# Altium PCB 如意硬件系统模块0831.PcbDoc (part 2 of 3)
Units mm, origin at the board's own origin, x right, y up, seen from the top; angles counter-clockwise.
Board outline 160 x 114.8 mm, 2 copper layers (Top Layer, Bottom Layer); 173 components, 141 nets, 673 pads, 206 vias.
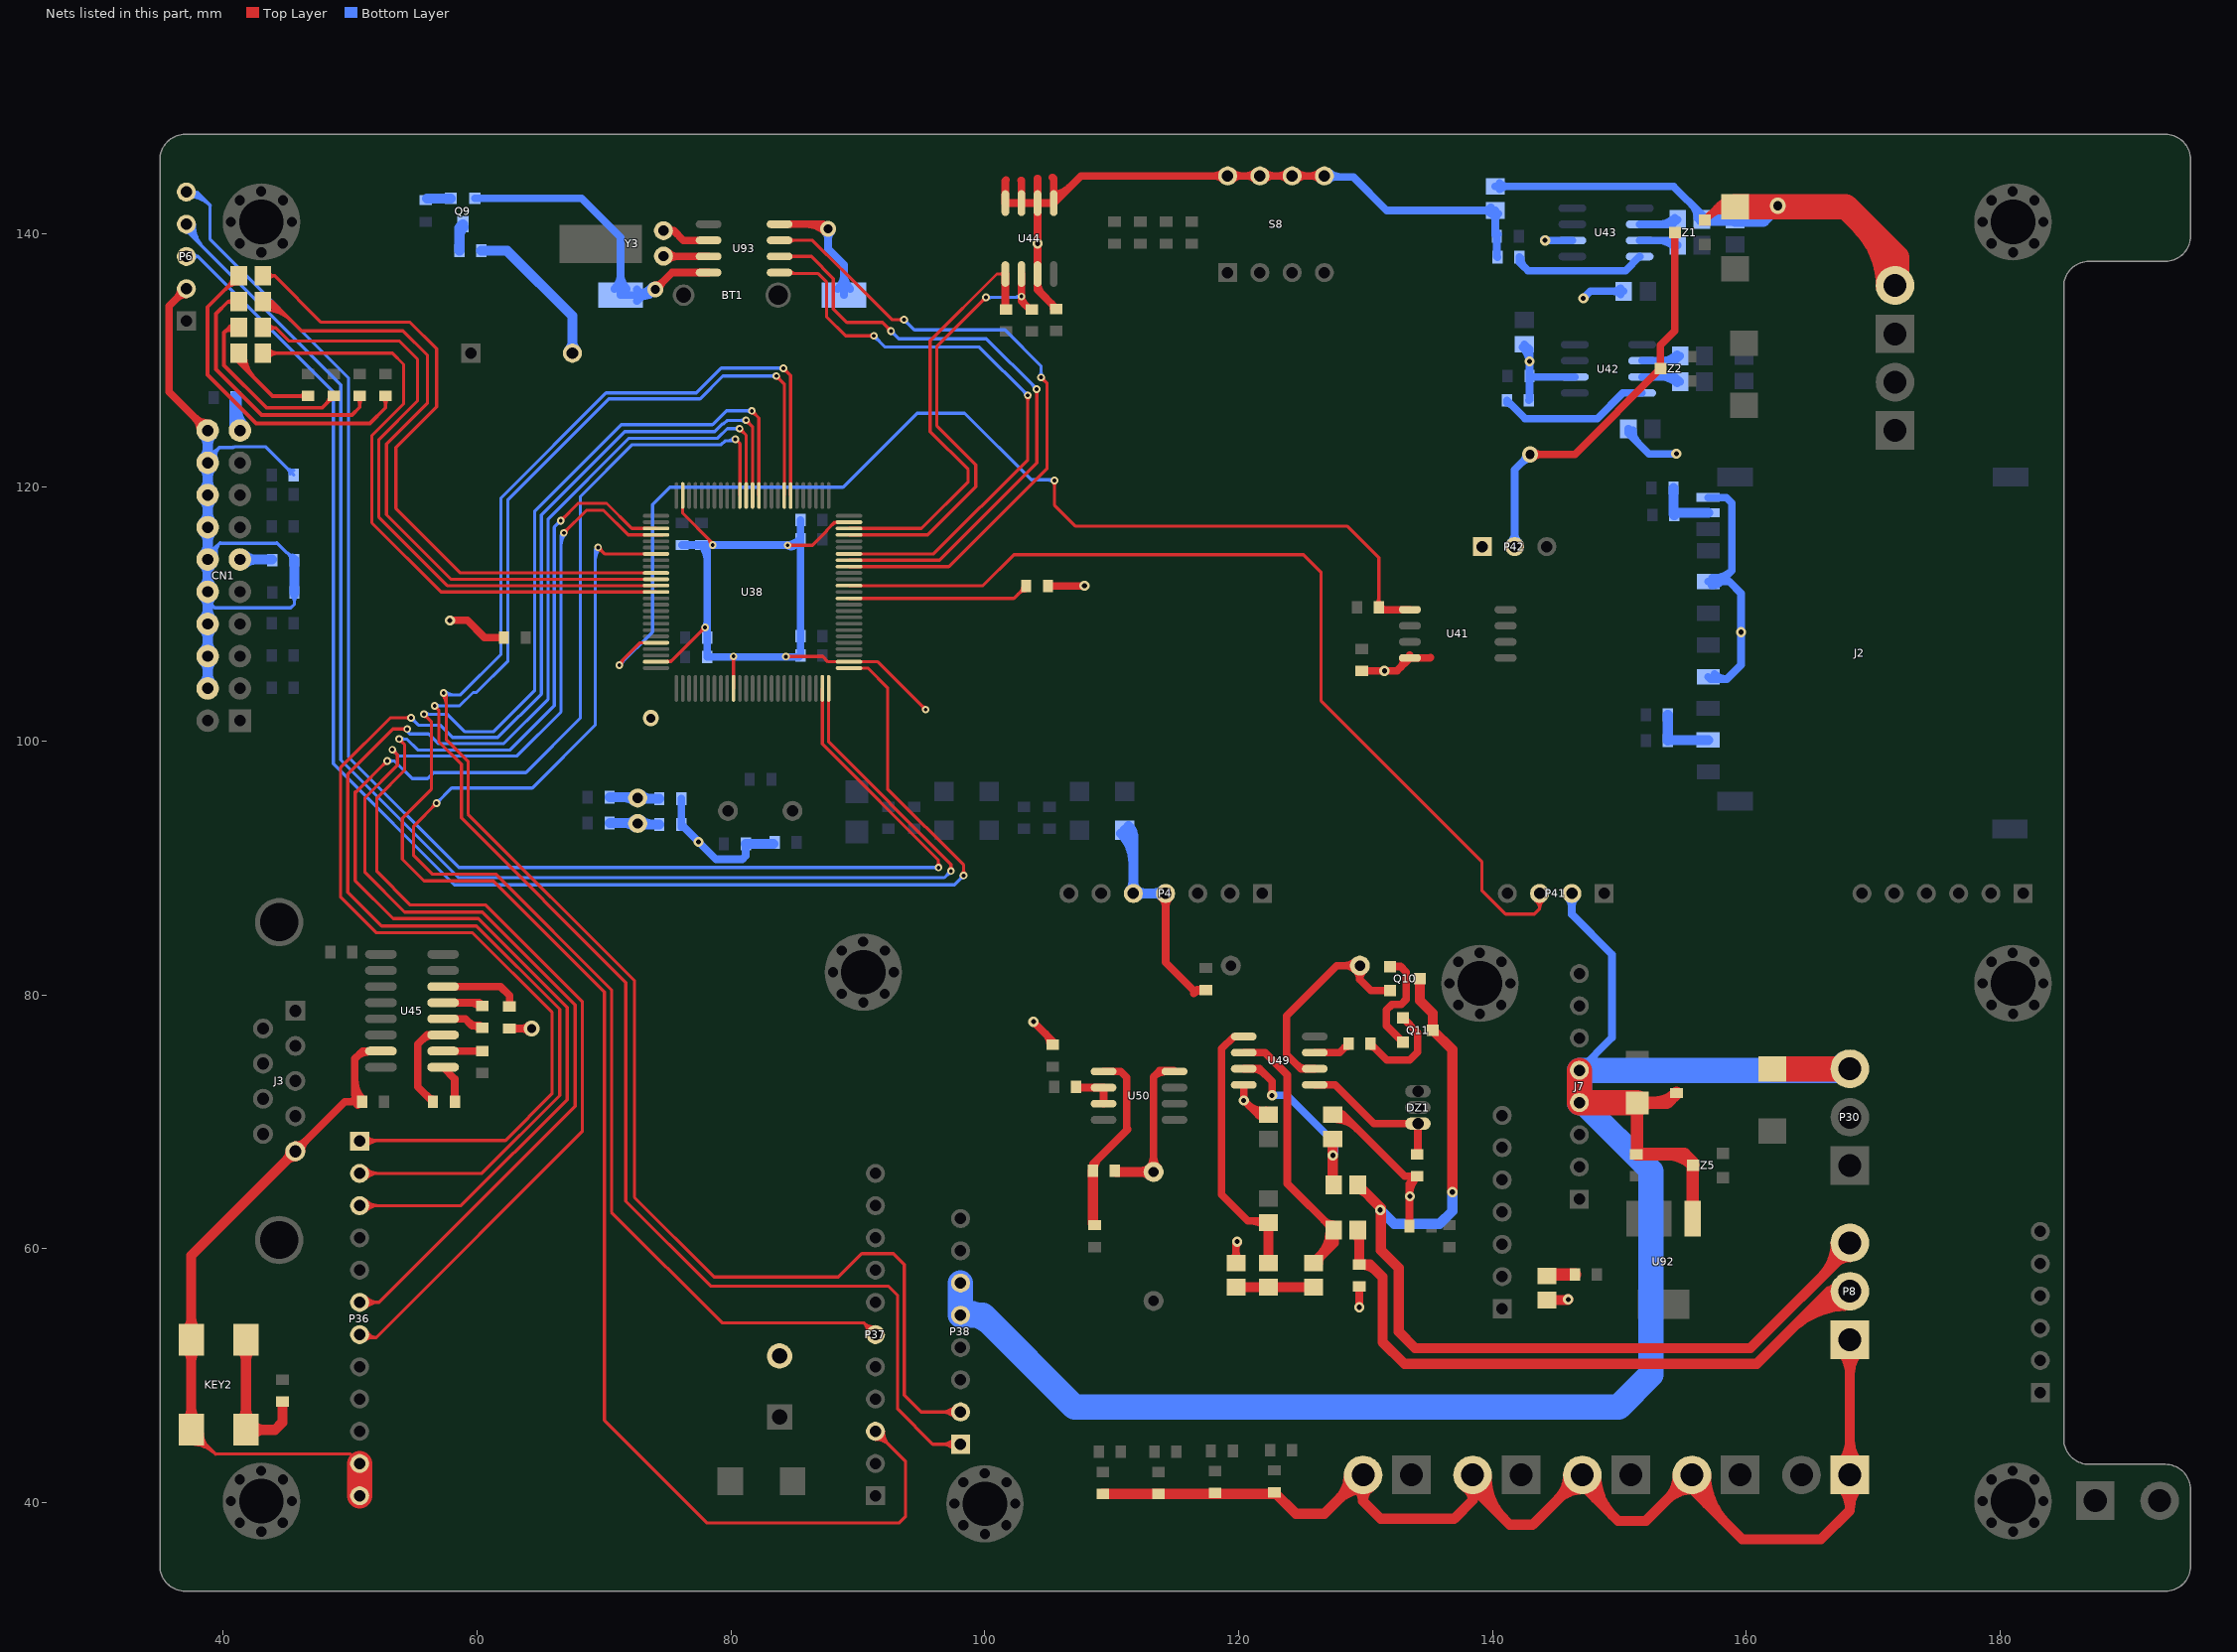
[diagram p2: the nets of this part, all layers, seen from the top]

## Via types
v1: diameter 0.6, hole 0.3, Top Layer to Bottom Layer, 151 vias
v2: diameter 0.8, hole 0.4, Top Layer to Bottom Layer, 35 vias
v3: diameter 1.27, hole 0.711, Top Layer to Bottom Layer, 15 vias
v4: diameter 1.8, hole 0.9, Top Layer to Bottom Layer, 2 vias
v5: diameter 1.8, hole 0.8, Top Layer to Bottom Layer, 1 vias
v6: diameter 1.66, hole 1.66, Top Layer to Bottom Layer, 1 vias
v7: diameter 1.18, hole 1.18, Top Layer to Bottom Layer, 1 vias

## Nets (pads, with @x,y where several pads share a name; then routed paths per layer and width w, separated by ;. In a path a pad name is that pad's centre, name@x,y a point inside that pad or via, vN(x,y) a via of type N, cw(c..) or ccw(c..) an arc to the next point about the centre after c; other vN are vias at no path point) (continued)
CAN2L: C73.2 D53.1 P44.2 R160.2 R357.2 Z1.2 | length 60.6
  Top Layer w0.6: Z1.2@156.713,141.024 157.795,142.106 ; Z1.2@156.998,141.309 cw(c158.718,139.589) D53.1@158.983,142.007 ; 157.196,141.507 cw(c157.905,140.798) D53.1@158.546,141.568 ; 157.66,141.971 cw(c158.327,141.305) D53.1@158.93,142.029 ; 157.882,142.193 cw(c158.893,141.182) D53.1@159.049,142.603 ; D53.1@158.384,141.762 ccw(c157.795,141.429) 157.795,142.106 ; D53.1@158.384,142.45 cw(c157.795,142.783) 157.795,142.106 ; D53.1@159.094,142.106 157.795,142.106
  Top Layer w2: D53.1@159.094,142.106 167.819,142.106 171.825,138.1 171.825,136.011 P44.2@171.704,135.89 ; 169.161,140.764 cw(c164.287,135.89) P44.2@171.18,135.89 ; P44.2@171.333,136.261 ccw(c170.147,137.447) 171.825,137.447
  Bottom Layer w0.6: C73.2@140.208,143.698 140.21,143.7 154.25,143.7 156.488,141.462 R357.2@156.488,141.09 ; C73.2@140.555,143.451 cw(c141.158,142.848) 141.158,143.7 ; C73.2@140.555,143.945 ccw(c141.148,144.538) 141.148,143.7 ; 155.698,142.252 cw(c154.636,141.19) R357.2@156.138,141.19
  Bottom Layer w1: R357.2@156.488,141.09 159.028,141.09 R160.2@159.094,141.024 161.324,141.024 v3(162.475,142.175)
CAN_GND: P42.2 Z1.3 Z2.3 | length 36.5
  Top Layer w0.6: v3@142.8,122.575 v3(142.95,122.575) 146.477,122.575 Z2.3@153.229,129.327 153.225,129.331 153.225,131.175 154.363,132.313 Z1.3@154.363,140.074 ; v3@143.187,122.338 cw(c143.759,121.766) 143.759,122.575 cw(c143.759,123.384) v3@143.187,122.812
  Bottom Layer w0.6: P42.2@141.414,115.634 ccw(c140.646,116.402) 141.732,116.402 ccw(c142.818,116.402) P42.2@142.05,115.634 ; P42.2@141.732,115.316 141.732,121.357 v3(142.95,122.575) ; v3@142.615,122.575 cw(c141.806,122.575) 142.378,122.003 cw(c142.95,121.431) v3@142.95,122.24
DATA: P36.3 U38.65 | length 118.1
  Top Layer w0.254: P36.3@50.736,63.384 58.736,63.384 67.081,71.73 67.081,79.019 60.096,86.004 53.381,86.004 50.394,88.992 50.394,95.987 50.47,95.987 v1(52.908,98.425) ; P36.3@50.997,63.123 cw(c51.627,62.493) 51.627,63.384 cw(c51.627,64.275) P36.3@50.997,63.645 ; P36.3@51.177,62.943 cw(c52.24,61.88) 52.24,63.384 cw(c52.24,64.888) P36.3@51.177,63.825 ; v1@52.735,98.425 cw(c52.318,98.425) 52.613,98.13 cw(c52.908,97.834) v1@52.908,98.252 ; v1(80.34,123.774) 80.692,123.422 U38.65@80.692,119.34
  Bottom Layer w0.254: v1(52.908,98.425) 53.492,98.425 54.889,97.028 56.083,97.028 56.566,97.511 63.83,97.511 68.125,101.805 68.125,119.255 72.212,123.342 79.223,123.342 79.527,123.647 80.213,123.647 v1(80.34,123.774) ; v1@53.031,98.303 cw(c53.326,98.007) 53.326,98.425 cw(c53.326,98.843) v1@53.031,98.547 ; 79.616,123.647 ccw(c79.616,124.498) v1@80.218,123.897
DS_I/O: U38.43 U93.6 | length 53.1
  Top Layer w0.254: U93.6@83.82,138.176 86.324,138.176 88.062,136.438 88.062,134.038 89.125,132.975 91.925,132.975 v1(92.6,132.3) ; U93.6@84.657,138.05 cw(c84.96,137.747) 84.96,138.176 cw(c84.96,138.605) U93.6@84.657,138.302 ; U38.43@89.292,114.24 96.435,114.24 104.1,121.905 104.1,127.7 v1(104.075,127.725) ; v1@92.427,132.3 ccw(c92.009,132.3) 92.305,132.595 ccw(c92.6,132.891) v1@92.6,132.473 ; v1@103.953,127.603 cw(c103.597,127.247) 104.1,127.247 ; 104.1,127.368 cw(c104.432,127.368) v1@104.197,127.603
  Bottom Layer w0.254: v1@92.6,132.127 cw(c92.6,131.709) 92.895,132.005 cw(c93.191,132.3) v1@92.773,132.3 ; v1(92.6,132.3) 93.201,131.699 100.101,131.699 v1(104.075,127.725) ; v1@103.902,127.725 ccw(c103.484,127.725) 103.78,128.02 ccw(c104.075,128.316) v1@104.075,127.898
DS_RST: U38.44 U93.5 | length 50.6
  Top Layer w0.254: U93.5@83.82,136.906 83.901,136.825 86.871,136.825 87.521,136.175 87.521,133.429 89.025,131.925 v1(91.25,131.925) ; U93.5@84.657,137.032 ccw(c85.156,137.531) 85.156,136.825 ; U38.44@89.292,114.74 95.969,114.74 103.375,122.146 v1(103.375,127.225) ; v1@91.128,131.803 ccw(c90.832,131.507) 90.832,131.925 ccw(c90.832,132.343) v1@91.128,132.047 ; v1@103.253,127.103 cw(c102.957,126.807) 103.375,126.807 cw(c103.793,126.807) v1@103.497,127.103
  Bottom Layer w0.254: v1@91.25,131.752 cw(c91.25,131.334) 91.545,131.63 cw(c91.841,131.925) v1@91.423,131.925 ; v1(91.25,131.925) 92.14,131.035 99.565,131.035 v1(103.375,127.225) ; v1@103.202,127.225 ccw(c102.784,127.225) 103.08,127.52 ccw(c103.375,127.816) v1@103.375,127.398
DS_SCLK: U38.42 U93.7 | length 55.1
  Top Layer w0.254: U93.7@83.82,139.446 86.411,139.446 88.75,137.107 88.75,137.125 92.675,133.2 v1(93.625,133.2) ; U93.7@84.657,139.32 cw(c84.96,139.017) 84.96,139.446 cw(c84.96,139.875) U93.7@84.657,139.572 ; U38.42@89.292,113.74 97.154,113.74 104.9,121.486 104.9,128.175 v1(104.425,128.65) ; v1@93.503,133.078 ccw(c93.207,132.782) 93.207,133.2 ccw(c93.207,133.618) v1@93.503,133.322 ; v1@104.425,128.477 cw(c104.425,128.059) 104.72,128.355 cw(c105.016,128.65) v1@104.598,128.65
  Bottom Layer w0.254: v1@93.625,133.027 cw(c93.625,132.609) 93.92,132.905 cw(c94.216,133.2) v1@93.798,133.2 ; v1(93.625,133.2) 94.44,132.385 101.575,132.385 104.425,129.534 v1(104.425,128.65) ; v1@104.303,128.772 ccw(c104.007,129.068) 104.425,129.068 ccw(c104.843,129.068) v1@104.547,128.772
F_CS: R153.1 U38.96 U41.1 | length 93.9
  Top Layer w0.254: v1@71.253,105.975 v1(71.2,105.975) 71.2,106.1 72.84,107.74 U38.96@74.092,107.74 ; v1@71.373,105.975 cw(c72.091,105.975) 71.583,106.483 ; v1@105.353,120.402 cw(c105.057,120.107) 105.475,120.107 cw(c105.893,120.107) v1@105.597,120.402 ; v1@105.475,120.575 105.475,118.6 107.159,116.916 128.559,116.916 131.031,114.444 R153.1@131.031,110.53 ; R153.1@130.834,110.821 ccw(c130.357,111.298) 131.031,111.298 ccw(c131.706,111.298) R153.1@131.229,110.821
  Top Layer w0.6: R153.1@131.031,110.53 131.215,110.346 U41.1@133.483,110.346 ; R153.1@131.106,110.512 ccw(c131.506,110.912) 131.506,110.346
  Bottom Layer w0.254: v1@71.2,106.148 ccw(c71.2,106.566) 71.495,106.27 ccw(c71.791,105.975) v1@71.373,105.975 ; v1@71.253,105.975 v1(71.2,105.975) 73.812,108.587 73.812,118.618 75.184,119.99 88.824,119.99 94.666,125.832 98.4,125.832 103.656,120.575 v1@105.475,120.575 ; 104.935,120.575 cw(c104.935,119.984) v1@105.353,120.402
  other v1: 105.475,120.524
GND: BT1.2 C5.1 C6.1 C14.2 C15.1 C16.1 C17.1 C18.1 C19.1 C20.1 C21.1 C22.1 C29.1 C31.1 C32.1 C33.1 C34.1 C36.1 C37.2 C44.1 C47.1 C49.2 C51.2 C53.2 C55.2 C56.2 C57.2 C69.1 C70.1 C72.2 C73.1 C74.2 C75.1 C76.2 C79.1 C80.2 C81.1 CN1.4 CN1.6 CN1.8 CN1.10 CN1.12 CN1.14 CN1.16 CN1.18 CN1.20 D60.1 J2.3 J2.6 J2.12 J3.5 J7.4 J7.5 KEY2.1 KEY2.4 L2.1 LD83.2 P4.4 P4.5 P6.2 P7.1 P8.1 P9.2 P10.2 P11.2 P12.2 P30.3 P36.11 P36.12 P38.5 P38.6 P41.2 P42.1 Q9.E R137.2 R144.1 R146.1 R147.1 R157.2 R158.2 R172.1 R177.1 R184.2 R191.2 R362.1 S8.5 S8.6 S8.7 S8.8 U38.10 U38.27 U38.49 U38.74 U38.99 U41.4 U42.2 U43.2 U44.1 U44.2 U44.3 U44.4 U44.7 U45.15 U49.4 U50.4 U92.1 U93.4 Z5.3 | length 843.2
  Top Layer w0.254: KEY2.1@37.465,44.597 cw(c37.465,41.886) 39.382,43.803 ; KEY2.1@37.465,44.851 cw(c37.465,42.753) 38.948,44.237 ; KEY2.1@37.465,45.105 cw(c37.465,43.62) 38.515,44.67 ; KEY2.1@37.465,45.72 39.36,43.825 49.975,43.825 P36.11@50.736,43.064 ; KEY2.1@38.084,45.47 ccw(c38.975,45.47) KEY2.1@38.345,44.84 ; KEY2.1@38.338,45.47 ccw(c39.842,45.47) 38.779,44.406 ; U38.99@74.092,106.24 75.24,106.24 v1(77.951,108.951) ; U38.99@74.997,106.258 ccw(c74.997,106.888) 75.443,106.443 ; U38.74@76.192,119.34 76.192,117.94 78.475,115.657 v1@78.475,115.275 ; v1@77.778,108.951 cw(c77.361,108.951) 77.656,108.656 cw(c77.951,108.361) v1@77.951,108.778 ; 78.154,115.978 cw(c77.616,115.44) v1@78.377,115.44 ; v1@80.07,106.545 cw(c79.774,106.249) 80.192,106.249 cw(c80.61,106.249) v1@80.314,106.545 ; U38.10@80.192,104.14 v1(80.192,106.667) v1@80.2,106.675 ; v1(84.325,106.65) 87.225,106.65 87.635,106.24 U38.27@89.292,106.24 91.56,106.24 v1(95.325,102.475) ; v1@84.447,106.528 cw(c84.743,106.232) 84.743,106.65 cw(c84.743,107.068) v1@84.447,106.772 ; v1(84.45,115.425) 86.412,115.425 87.552,116.565 87.552,116.61 88.182,117.24 U38.49@89.292,117.24 ; v1@84.572,115.303 cw(c84.868,115.007) 84.868,115.425 cw(c84.868,115.843) v1@84.572,115.547 ; 88.007,117.065 cw(c88.387,116.685) U38.49@88.387,117.222 ; 88.08,117.138 cw(c88.307,116.911) U38.49@88.383,117.223 ; v1@95.152,102.475 ccw(c94.734,102.475) 95.03,102.77 ccw(c95.325,103.066) v1@95.325,102.648
  Top Layer w0.6: P6.2@36.634,135.636 cw(c35.548,135.636) 36.316,134.868 cw(c37.084,134.1) P6.2@37.084,135.186 ; P6.2@37.084,135.636 35.71,134.262 35.71,127.516 CN1.20@38.766,124.46 ; CN1.20@38.177,124.46 ccw(c36.755,124.46) 37.76,125.465 ccw(c38.766,126.471) CN1.20@38.766,125.049 ; J3.5@45.67,67.666 49.575,71.571 C36.1@50.924,71.571 50.35,72.145 50.35,74.95 50.965,75.565 U45.15@52.414,75.565 ; J3.5@45.67,68.153 ccw(c45.67,69.33) 46.502,68.498 ccw(c47.334,67.666) J3.5@46.157,67.666 ; 50.35,71.858 ccw(c51.117,71.858) C36.1@50.575,71.316 ; 50.35,73.307 ccw(c52.566,73.307) C36.1@50.999,71.74 ; 50.491,75.091 cw(c51.514,74.069) U45.15@51.514,75.515 ; C36.1@50.582,71.912 ccw(c50.924,72.254) C36.1@50.924,71.771 ; 50.691,75.291 cw(c51.296,74.685) U45.15@51.502,75.516 ; v2(57.85,109.5) 59.225,109.5 60.578,108.147 R147.1@62.1,108.147 ; C34.1@62.541,77.34 v3(64.285,77.34) ; v3@64.048,77.103 ccw(c63.476,76.531) 63.476,77.34 ccw(c63.476,78.149) v3@64.048,77.577 ; v3(74.025,135.575) 75.356,136.906 U93.4@78.232,136.906 ; v3@74.025,135.91 ccw(c74.025,136.719) 74.597,136.147 ccw(c75.169,135.575) v3@74.36,135.575 ; 101.675,144.2 101.61,144.135 U44.4@101.61,142.381 U44.3@102.88,142.381 ; 102.85,144.175 102.88,144.145 U44.3@102.88,142.381 ; v2(103.825,77.875) 105.343,76.357 C51.2@105.343,76.059 ; 104.15,144.325 U44.2@104.15,142.381 ; U44.7@104.155,136.082 ccw(c105.451,136.082) 104.535,135.165 ; 104.791,76.909 cw(c103.941,76.059) C51.2@105.143,76.059 ; R137.2@104.975,112.211 107.836,112.211 v2(107.85,112.225) ; 105.244,134.456 cw(c104.836,134.048) C29.1@105.413,134.048 ; 105.325,144.4 105.42,144.305 U44.1@105.42,142.381 ; U44.1@105.42,142.497 ccw(c105.42,142.777) U44.1@105.618,142.579 ; U44.1@105.42,143.097 ccw(c105.42,144.826) 106.642,143.604 ; C29.1@105.613,134.087 104.15,135.55 U44.7@104.15,136.793 v2(104.15,139.2) U44.2@104.15,142.381 ; R172.1@112.939,66.385 ccw(c112.107,67.217) 113.284,67.217 ccw(c114.461,67.217) R172.1@113.629,66.385 ; R172.1@113.284,66.04 113.284,73.534 113.775,74.025 114.867,74.025 U50.4@114.938,73.954 ; 113.326,73.576 cw(c114.227,72.675) U50.4@114.227,73.949 ; 113.514,73.764 cw(c114.028,73.249) U50.4@114.225,73.949 ; P4.4@113.918,87.666 cw(c113.15,86.898) 114.236,86.898 cw(c115.322,86.898) P4.4@114.554,87.666 ; P4.4@114.236,87.984 114.236,82.564 116.575,80.225 116.738,80.388 C44.1@117.405,80.388 ; 116.451,80.101 cw(c117.011,79.541) C44.1@117.276,80.288 ; S8.8@118.808,144.208 ccw(c118.04,143.44) 118.04,144.526 ccw(c118.04,145.612) S8.8@118.808,144.844 ; S8.8@119.444,144.208 cw(c120.212,143.44) 120.212,144.526 cw(c120.212,145.612) S8.8@119.444,144.844 ; R184.2@119.541,59.113 ccw(c118.943,59.711) 119.788,59.711 ccw(c120.633,59.711) R184.2@120.035,59.113 ; R184.2@119.788,58.866 119.788,60.588 v2@119.825,60.625 ; 119.788,60.099 cw(c120.326,60.099) v2@119.946,60.479 ; U49.4@120.396,72.898 v2(120.396,71.679) 121.525,70.55 ; 120.748,71.327 ccw(c121.863,72.443) C49.2@122.162,70.894 ; S8.7@121.348,144.208 ccw(c120.58,143.44) 120.58,144.526 ccw(c120.58,145.612) S8.7@121.348,144.844 ; 121.547,70.528 ccw(c122.122,71.102) C49.2@122.275,70.305 ; C49.2@121.949,70.339 ccw(c121.525,70.019) 121.525,70.55 ; C49.2@121.949,70.761 cw(c121.525,71.081) 121.525,70.55 ; S8.7@121.984,144.208 cw(c122.752,143.44) 122.752,144.526 cw(c122.752,145.612) S8.7@121.984,144.844 ; C49.2@122.328,70.55 121.525,70.55 ; S8.6@123.888,144.208 ccw(c123.12,143.44) 123.12,144.526 ccw(c123.12,145.612) S8.6@123.888,144.844 ; S8.6@124.524,144.208 cw(c125.292,143.44) 125.292,144.526 cw(c125.292,145.612) S8.6@124.524,144.844 ; S8.5@126.428,144.208 ccw(c125.66,143.44) 125.66,144.526 ccw(c125.66,145.612) S8.5@126.428,144.844 ; S8.5@126.746,144.526 S8.6@124.206,144.526 S8.7@121.666,144.526 S8.8@119.126,144.526 107.565,144.526 U44.1@105.42,142.381 ; R177.1@127.408,70.55 128.225,70.55 ; R177.1@127.508,70.2 cw(c127.508,67.624) 129.329,69.446 ; R177.1@127.508,70.8 cw(c127.508,69.673) 128.305,70.47 ; R177.1@127.711,70.265 cw(c128.104,69.712) 128.583,70.192 ; R177.1@127.784,70.335 cw(c128.225,69.991) 128.225,70.55 ; R177.1@127.784,70.765 ccw(c128.225,71.109) 128.225,70.55 ; v2@129.497,55.275 R362.1@129.497,57.024 ; C33.1@129.688,105.517 132.464,105.517 U41.4@133.483,106.536 135.061,106.536 135.1,106.575 ; 132.751,105.804 ccw(c132.264,106.291) U41.4@132.908,106.536 ; U41.4@133.407,106.46 ccw(c133.214,106.652) U41.4@133.469,106.749 ; C53.2@133.446,61.785 133.446,65.104 R191.2@134.055,65.713 133.062,65.713 128.225,70.55 ; v2@133.446,64.212 cw(c135.463,64.212) R191.2@134.037,65.638 ; 133.446,64.915 cw(c134.162,64.915) R191.2@133.987,65.61 ; R191.2@133.714,65.372 ccw(c133.372,65.713) R191.2@133.855,65.713 ; U44.3@102.88,142.381 U44.2@104.15,142.381 ; U44.2@104.15,142.381 U44.1@105.42,142.381
  Top Layer w0.8: KEY2.1@37.041,46.394 ccw(c36.016,47.419) 37.465,47.419 ccw(c38.914,47.419) KEY2.1@37.889,46.394 ; KEY2.4@37.041,52.158 cw(c36.016,51.133) 37.465,51.133 cw(c38.914,51.133) KEY2.4@37.889,52.158 ; KEY2.4@37.041,53.506 ccw(c36.016,54.531) 37.465,54.531 ccw(c38.914,54.531) KEY2.4@37.889,53.506 ; KEY2.1@37.465,45.72 KEY2.4@37.465,52.832 37.465,59.461 J3.5@45.67,67.666 ; J3.5@45.283,67.666 cw(c44.347,67.666) 45.009,67.004 cw(c45.67,66.343) J3.5@45.67,67.278 ; C55.2@109.3,40.673 C76.2@113.677,40.673 C56.2@122.673,40.673 ; C47.1@110.339,66.04 R172.1@113.284,66.04 ; R172.1@113.01,65.766 ccw(c112.349,65.105) 112.349,66.04 ccw(c112.349,66.975) R172.1@113.01,66.314 ; C56.2@122.896,40.708 C56.2@122.802,40.802 124.504,39.1 126.73,39.1 P10.2@129.794,42.164 129.794,40.106 ; P10.2@128.67,42.164 cw(c125.956,42.164) 127.875,40.245 cw(c129.794,38.326) P10.2@129.794,41.04 ; P10.2@129.187,41.218 cw(c128.472,40.106) 129.794,40.106 ; P10.2@130.401,41.218 ccw(c131.116,40.106) 129.794,40.106 ; P12.2@137.852,41.2 cw(c137.241,40.18) 138.43,40.18 ; P12.2@138.754,42.149 ccw(c141.563,42.015) 139.574,40.026 ; P12.2@139.008,41.2 ccw(c139.619,40.18) 138.43,40.18 ; P12.2@139.553,42.11 ccw(c144.004,41.898) 140.853,38.747 ; LD83.2@144.272,55.946 145.896,55.946 v2(145.95,56) ; P9.2@145.942,42.164 cw(c143.228,42.164) 145.147,40.245 cw(c147.066,38.326) P9.2@147.066,41.04 ; P9.2@147.39,42.157 ccw(c149.97,42.105) 148.145,40.28 ; P9.2@148.19,42.141 ccw(c152.571,42.051) 149.472,38.953 ; P11.2@154.578,42.164 cw(c151.864,42.164) 153.783,40.245 cw(c155.702,38.326) P11.2@155.702,41.04 ; P11.2@156.026,42.164 ccw(c159.502,42.164) 157.044,39.706 ; P11.2@156.826,42.164 ccw(c162.234,42.164) 158.41,38.34 ; P7.1@167.353,41.369 cw(c165.434,39.45) 168.148,39.45 cw(c170.862,39.45) P7.1@168.943,41.369 ; P7.1@167.353,42.959 ccw(c165.434,44.878) 168.148,44.878 ccw(c170.862,44.878) P7.1@168.943,42.959 ; P8.1@167.353,52.037 cw(c165.434,50.118) 168.148,50.118 cw(c170.862,50.118) P8.1@168.943,52.037 ; P8.1@168.148,52.832 P7.1@168.148,42.164 168.148,39.373 165.875,37.1 159.65,37.1 155.702,41.048 P11.2@155.702,42.164 152.088,38.55 149.875,38.55 147.066,41.359 P9.2@147.066,42.164 143.152,38.25 141.35,38.25 138.43,41.17 138.43,40.18 ; 129.794,40.106 131.175,38.725 136.975,38.725 138.43,40.18
  Top Layer w1: C80.2@151.101,71.207 cw(c150.418,70.524) 151.384,70.524 cw(c152.35,70.524) 151.667,71.207 cw(c152.35,70.524) 152.35,71.49 cw(c152.35,72.456) C80.2@151.667,71.773 ; 152.763,71.49 ccw(c152.763,73.892) C81.1@154.462,72.194 ; 153.739,67.44 cw(c153.739,64.515) Z5.3@155.807,66.583 ; C81.1@154.489,72.26 153.719,71.49 C80.2@151.384,71.49 151.384,67.497 C79.1@151.327,67.44 155.11,67.44 155.757,66.793 U92.1@155.757,62.362
  Top Layer w2: P36.12@50.736,40.524 P36.11@50.736,43.064 ; J7.5@146.834,74.052 J7.4@146.834,71.512 146.856,71.49 C80.2@151.384,71.49 ; D60.1@162.052,74.168 P30.3@168.148,74.168
  Bottom Layer w0.254: CN1.10@38.766,111.76 38.766,111.034 39.31,110.49 45.315,110.49 45.596,110.771 R144.1@45.596,111.703 ; CN1.12@38.766,114.3 38.766,114.641 39.75,115.625 ; CN1.12@38.766,115.062 ccw(c38.766,116.078) 39.485,115.36 ; CN1.18@38.766,121.92 38.766,122.216 39.675,123.125 ; CN1.18@38.766,122.682 ccw(c38.766,123.807) 39.562,123.012 ; CN1.18@39.24,122.102 cw(c39.894,122.354) 39.399,122.849 ; CN1.12@39.249,114.458 cw(c40.065,114.725) 39.458,115.333 ; CN1.18@39.477,122.193 cw(c40.293,122.507) 39.675,123.125 ; CN1.12@39.49,114.537 cw(c40.505,114.87) 39.75,115.625 ; 40.802,123.136 40.791,123.125 ; 44.902,121.598 ccw(c45.539,122.234) C14.2@45.539,121.334 ; 44.959,114.88 ccw(c45.596,115.516) R146.1@45.596,114.616 ; 45.128,121.372 cw(c44.811,121.055) C14.2@45.26,121.055 ; 45.185,114.654 cw(c44.868,114.337) R146.1@45.317,114.337 ; R144.1@45.399,111.412 cw(c44.922,110.935) 45.596,110.935 cw(c46.271,110.935) R144.1@45.794,111.412 ; C14.2@45.539,120.961 43.31,123.19 40.856,123.19 40.791,123.125 ; R146.1@45.596,114.554 R146.1@45.596,114.243 44.215,115.624 44.161,115.57 39.805,115.57 39.75,115.625 ; 39.675,123.125 40.791,123.125
  Bottom Layer w0.6: Q9.E@59.817,142.748 68.227,142.748 71.3,139.675 BT1.2@71.3,135.128 v3@73.578,135.128 ; BT1.2@70.805,135.623 ccw(c69.61,136.818) 71.3,136.818 ccw(c72.99,136.818) BT1.2@71.795,135.623 ; BT1.2@72.137,135.128 ccw(c72.137,137.463) v3@73.788,135.812 ; BT1.2@72.58,134.671 cw(c73.578,133.81) v3@73.578,135.128 ; BT1.2@72.58,135.585 ccw(c73.578,136.446) v3@73.578,135.128 ; v3(74.025,135.575) v3@73.578,135.128 ; C70.1@76.076,93.215 cw(c76.076,92.732) C70.1@76.418,93.074 ; C69.1@76.076,95.447 C70.1@76.076,93.415 78.816,90.675 80.875,90.675 81.156,90.956 C5.1@81.156,91.891 ; C15.1@76.143,115.44 C16.1@77.667,115.44 ; C16.1@77.685,115.365 cw(c76.665,114.344) 78.108,114.344 ; C21.1@78.108,108.572 ccw(c77.572,108.572) v1(77.951,108.951) ccw(c77.572,109.33) 78.108,109.33 ; v1@84.372,115.44 ccw(c84.372,116.883) C18.1@85.393,115.863 ; C18.1@85.409,115.822 cw(c84.45,116.781) v1(84.45,115.425) ccw(c84.731,115.736) 85.027,115.44 ; C22.1@85.468,117.405 C18.1@85.468,115.881 ; S8.5@126.746,144.526 126.822,144.45 129.025,144.45 131.677,141.798 C73.1@140.208,141.798 140.208,139.881 C32.1@140.332,139.757 140.332,138.176 R158.2@140.389,138.119 ; S8.5@127.064,144.208 cw(c127.649,143.623) 127.649,144.45 ; S8.5@127.064,144.844 ccw(c128.016,145.796) 128.016,144.45 ; C73.1@139.861,141.551 ccw(c139.263,140.953) 139.263,141.798 ccw(c139.263,142.643) C73.1@139.861,142.045 ; C73.1@139.961,141.551 cw(c139.363,140.953) 140.208,140.953 cw(c141.053,140.953) C73.1@140.455,141.551 ; 140.208,140.406 ccw(c140.888,140.406) C32.1@140.407,139.926 ; C75.1@142.354,131.025 cw(c141.012,129.683) v2@142.909,129.683 ; C75.1@142.501,131.272 142.909,130.864 C31.1@142.909,128.757 ; R157.2@142.852,126.839 142.909,126.896 C31.1@142.909,128.757 ; v2@144.05,139.525 v2(144.136,139.439) U43.2@146.28,139.439 ; P41.2@145.922,87.666 cw(c145.154,86.898) 146.24,86.898 cw(c147.326,86.898) P41.2@146.558,87.666 ; P41.2@146.24,87.984 146.24,86.335 149.4,83.175 149.4,76.618 J7.5@146.834,74.052 ; U42.2@146.475,128.687 142.979,128.687 C31.1@142.909,128.757 ; J7.5@146.834,74.502 ccw(c146.834,75.588) 147.602,74.82 ccw(c148.37,74.052) J7.5@147.284,74.052 ; v2(147.15,134.875) 147.712,135.437 C72.2@150.333,135.437 ; C72.2@150.086,135.19 ccw(c149.488,134.592) 149.488,135.437 ccw(c149.488,136.282) C72.2@150.086,135.684 ; C74.2@150.695,124.602 150.695,124.26 152.33,122.625 v2@154.45,122.625 ; C74.2@151.045,124.502 ccw(c152.474,124.502) 151.464,123.491 ; J2.12@156.972,119.177 158.423,119.177 158.85,118.75 158.85,113.425 ; J2.3@156.981,105.059 157.165,104.875 158.45,104.875 ; J2.6@156.981,112.559 157.984,112.559 ; J2.6@157.257,112.26 ccw(c157.327,113.115) 157.933,112.508 ; J2.6@157.306,112.858 ccw(c157.465,114.809) 158.85,113.425 ; J2.3@157.493,105.271 ccw(c158.45,106.227) 158.45,104.875 ; J2.6@157.493,112.347 cw(c158.005,111.835) 158.005,112.559 cw(c158.005,113.283) J2.6@157.493,112.771 ; C16.1@77.667,115.44 85.027,115.44 ; C16.1@77.667,115.44 78.108,114.999 C21.1@78.108,108.147 C17.1@78.108,106.623 85.354,106.623 C19.1@85.468,106.737 C20.1@85.468,108.261 C18.1@85.468,115.881 ; 85.027,115.44 C18.1@85.468,115.881 ; 157.984,112.559 cw(c157.984,113.232) 157.498,112.767 ccw(c157.984,113.232) 157.984,112.559 ; 157.984,112.559 ccw(c157.984,111.886) 157.498,112.351 cw(c157.984,111.886) 157.984,112.559 ; 157.984,112.559 158.641,112.559 159.575,111.625 159.575,106 158.45,104.875 ; 157.984,112.559 158.85,113.425
  Bottom Layer w0.8: CN1.4@38.42,104.486 ccw(c37.585,105.321) 38.766,105.321 ccw(c39.947,105.321) CN1.4@39.112,104.486 ; CN1.6@38.42,106.334 cw(c37.585,105.499) 38.766,105.499 cw(c39.947,105.499) CN1.6@39.112,106.334 ; CN1.6@38.42,107.026 ccw(c37.585,107.861) 38.766,107.861 ccw(c39.947,107.861) CN1.6@39.112,107.026 ; CN1.8@38.42,108.874 cw(c37.585,108.039) 38.766,108.039 cw(c39.947,108.039) CN1.8@39.112,108.874 ; CN1.8@38.42,109.566 ccw(c37.585,110.401) 38.766,110.401 ccw(c39.947,110.401) CN1.8@39.112,109.566 ; CN1.10@38.42,111.414 cw(c37.585,110.579) 38.766,110.579 cw(c39.947,110.579) CN1.10@39.112,111.414 ; CN1.10@38.42,112.106 ccw(c37.585,112.941) 38.766,112.941 ccw(c39.947,112.941) CN1.10@39.112,112.106 ; CN1.12@38.42,113.954 cw(c37.585,113.119) 38.766,113.119 cw(c39.947,113.119) CN1.12@39.112,113.954 ; CN1.12@38.42,114.646 ccw(c37.585,115.481) 38.766,115.481 ccw(c39.947,115.481) CN1.12@39.112,114.646 ; CN1.14@38.42,116.494 cw(c37.585,115.659) 38.766,115.659 cw(c39.947,115.659) CN1.14@39.112,116.494 ; CN1.14@38.42,117.186 ccw(c37.585,118.021) 38.766,118.021 ccw(c39.947,118.021) CN1.14@39.112,117.186 ; CN1.16@38.42,119.034 cw(c37.585,118.199) 38.766,118.199 cw(c39.947,118.199) CN1.16@39.112,119.034 ; CN1.16@38.42,119.726 ccw(c37.585,120.561) 38.766,120.561 ccw(c39.947,120.561) CN1.16@39.112,119.726 ; CN1.18@38.42,121.574 cw(c37.585,120.739) 38.766,120.739 cw(c39.947,120.739) CN1.18@39.112,121.574 ; CN1.18@38.42,122.266 ccw(c37.585,123.101) 38.766,123.101 ccw(c39.947,123.101) CN1.18@39.112,122.266 ; CN1.20@38.42,124.114 cw(c37.585,123.279) 38.766,123.279 cw(c39.947,123.279) CN1.20@39.112,124.114 ; CN1.4@38.766,104.14 CN1.6@38.766,106.68 CN1.8@38.766,109.22 CN1.10@38.766,111.034 ; CN1.10@38.766,111.76 CN1.12@38.766,114.3 ; CN1.12@38.766,114.641 CN1.14@38.766,116.84 CN1.16@38.766,119.38 CN1.18@38.766,121.92 ; CN1.18@38.766,122.216 CN1.20@38.766,124.46 ; R144.1@45.596,111.703 R146.1@45.596,114.243 ; C5.1@81.156,91.891 C6.1@83.322,91.891 ; L2.1@110.742,92.708 cw(c108.439,90.405) 111.696,90.405 ; L2.1@110.998,92.964 111.696,92.266 P4.5@111.696,87.984 P4.4@114.236,87.984 ; L2.1@111.308,93.274 cw(c110.37,92.336) L2.1@111.696,92.336 ; P4.5@111.449,88.231 ccw(c110.851,88.829) 111.696,88.829 ccw(c112.541,88.829) 111.943,88.231 ccw(c112.541,88.829) 112.541,87.984 ccw(c112.541,87.139) P4.5@111.943,87.737 ; P4.4@113.989,87.737 ccw(c113.391,87.139) 113.391,87.984 ccw(c113.391,88.829) P4.4@113.989,88.231
  Bottom Layer w1.8: J7.4@147.052,71.512 152.475,66.089
  Bottom Layer w2: P38.6@98.084,57.288 P38.5@98.084,54.748 99.827,54.748 107.05,47.525 149.925,47.525 152.475,50.075 152.475,66.089 ; J7.4@147.052,71.512 J7.4@146.834,71.512 J7.5@146.834,74.052 168.032,74.052 P30.3@168.148,74.168 ; 166.603,74.052 ccw(c166.603,75.713) P30.3@167.777,74.539 ; P38.5@98.084,54.998 cw(c98.084,51.394) 100.633,53.942 ccw(c98.084,51.394) P38.5@98.084,54.998
  other v1: 78.55,115.44
  other v2: 129.5,55.375 119.875,60.55 133.475,64.125 77.436,92.055 131.475,105.525 159.575,108.575 154.475,122.625 142.909,129.9
  other v3: 73.675,101.803
GPRS: P37.3 U38.62 | length 160.4
  Top Layer w0.254: v1@55.804,101.935 cw(c55.804,101.517) 56.099,101.813 cw(c56.394,102.108) v1@55.977,102.108 ; v1(55.804,102.108) 56.388,101.524 56.388,96.19 54.102,93.904 54.102,90.678 55.804,88.976 61.265,88.976 70.028,80.213 70.028,46.472 78.125,38.375 93.225,38.375 93.75,38.9 93.75,43.23 P37.3@91.376,45.604 ; v1@81.636,125.836 cw(c81.636,125.419) 81.931,125.714 cw(c82.226,126.009) v1@81.809,126.009 ; v1(81.636,126.009) 82.192,125.453 U38.62@82.192,119.34 ; P37.3@91.376,44.981 cw(c91.376,43.477) 92.44,44.54 cw(c93.503,45.604) P37.3@91.999,45.604 ; P37.3@91.376,45.235 cw(c91.376,44.344) 92.006,44.974 cw(c92.636,45.604) P37.3@91.745,45.604
  Bottom Layer w0.254: v1(55.804,102.108) 57.633,102.108 59.004,100.736 61.316,100.736 64.525,103.946 64.525,118.094 71.349,124.917 78.537,124.917 79.629,126.009 v1(81.636,126.009) ; v1@55.926,101.986 cw(c56.221,101.69) 56.221,102.108 cw(c56.221,102.526) v1@55.926,102.23 ; v1@81.513,125.887 ccw(c81.218,125.592) 81.218,126.009 ccw(c81.218,126.427) v1@81.513,126.132 ; P37.3@91.122,45.35 P37.3@91.376,45.604
GPRS_RXD: P36.7 U38.78 | length 109.1
  Top Layer w0.254: P36.7@50.736,53.224 50.96,53 52.05,53 ; P36.7@51.072,53.376 ccw(c51.656,53.641) 51.656,53 ; P36.7@51.177,52.783 cw(c51.699,52.261) 51.699,53 ; P36.7@51.303,53.481 ccw(c52.05,53.82) 52.05,53 ; v1@53.848,99.979 cw(c53.848,99.562) 54.143,99.857 cw(c54.439,100.152) v1@54.021,100.152 ; v1(53.848,100.152) 54.28,99.72 54.28,97.699 52.095,95.515 52.095,89.713 54.737,87.071 60.681,87.071 68.275,79.477 68.275,69.225 52.05,53 ; v1(66.575,117.35) 67.95,118.725 70.2,118.725 72.185,116.74 U38.78@74.092,116.74 ; v1@66.575,117.523 ccw(c66.575,117.941) 66.87,117.645 ccw(c67.166,117.35) v1@66.748,117.35
  Bottom Layer w0.254: v1(53.848,100.152) 54.436,100.152 55.3,99.289 62.586,99.289 66.075,102.778 66.075,116.85 v1(66.575,117.35) ; v1@53.97,100.03 cw(c54.266,99.735) 54.266,100.152 cw(c54.266,100.57) v1@53.97,100.275 ; v1@66.402,117.35 cw(c65.984,117.35) 66.28,117.055 cw(c66.575,116.759) v1@66.575,117.177
GPRS_TXD: P36.6 U38.79 | length 108.7
  Top Layer w0.254: P36.6@50.736,55.764 52.264,55.764 67.716,71.216 67.716,79.197 60.401,86.512 54.28,86.512 51.156,89.637 51.156,95.529 53.721,98.095 53.721,98.908 v1(53.315,99.314) ; P36.6@50.997,55.503 cw(c51.627,54.873) 51.627,55.764 cw(c51.627,56.655) P36.6@50.997,56.025 ; P36.6@51.177,55.323 cw(c52.24,54.26) 52.24,55.764 cw(c52.24,57.268) P36.6@51.177,56.205 ; v1@53.315,99.141 cw(c53.315,98.723) 53.61,99.019 cw(c53.905,99.314) v1@53.488,99.314 ; v1(66.825,116.4) 68.6,118.175 69.95,118.175 71.885,116.24 U38.79@74.092,116.24 U38.79@74.592,116.24 ; v1@66.825,116.573 ccw(c66.825,116.991) 67.12,116.695 ccw(c67.416,116.4) v1@66.998,116.4
  Bottom Layer w0.254: v1@53.315,99.141 cw(c53.315,98.723) 53.61,99.019 cw(c53.905,99.314) v1@53.488,99.314 ; v1(53.315,99.314) 53.804,98.825 63.138,98.825 66.6,102.287 66.6,116.175 v1(66.825,116.4) ; 66.6,115.439 cw(c67.786,115.439) v1@66.947,116.278 ; 66.6,116.052 cw(c67.173,116.052) v1@66.768,116.457
GPS_PPS: P6.5 U38.24 | length 124.5
  Top Layer w0.254: U38.24@87.192,104.14 87.192,99.758 96.325,90.625 96.325,90.05 v1(96.35,90.025) ; v1@96.228,90.147 ccw(c95.993,90.382) 96.325,90.382 ; 96.325,90.503 ccw(c96.828,90.503) v1@96.472,90.147
  Bottom Layer w0.254: P6.5@37.075,143.395 cw(c37.167,141.986) 38.166,142.984 ; P6.5@37.084,143.256 37.894,143.256 38.95,142.2 38.95,139.525 49.86,128.615 49.86,98.73 58.565,90.025 v1(96.35,90.025) ; P6.5@37.092,143.141 cw(c37.216,141.242) 38.562,142.588 ; P6.5@37.108,142.888 cw(c37.265,140.498) 38.959,142.191 ; v1@96.228,89.903 ccw(c95.932,89.607) 95.932,90.025 ccw(c95.932,90.443) v1@96.228,90.147
GPS_RX: P6.4 U38.25 | length 124.2
  Top Layer w0.254: U38.25@87.692,104.14 87.692,99.919 97.325,90.286 v1(97.325,89.75) ; v1@97.203,89.872 ccw(c96.907,90.168) 97.325,90.168 ccw(c97.743,90.168) v1@97.447,89.872
  Bottom Layer w0.254: P6.4@37.084,140.093 cw(c37.084,139.754) 37.324,139.994 ; P6.4@37.084,140.716 37.084,140.233 49.251,128.067 49.251,98.501 58.522,89.23 96.805,89.23 v1(97.325,89.75) ; P6.4@37.199,140.716 ccw(c38.642,140.716) 37.622,139.696 ; P6.4@37.453,140.716 ccw(c39.509,140.716) 38.055,139.262 ; P6.4@37.707,140.716 ccw(c40.376,140.716) 38.489,138.829 ; v1@97.152,89.75 cw(c96.734,89.75) 97.03,89.455 cw(c97.325,89.159) v1@97.325,89.577
GPS_TX: P6.3 U38.26 | length 122.3
  Top Layer w0.254: U38.26@89.292,105.74 90.785,105.74 92.329,104.196 92.329,96.215 98.325,90.219 v1(98.325,89.4) ; v1@98.203,89.522 ccw(c97.907,89.818) 98.325,89.818 ccw(c98.743,89.818) v1@98.447,89.522
  Bottom Layer w0.254: P6.3@37.084,138.176 37.998,138.176 ; P6.3@37.664,137.948 cw(c37.998,137.817) 37.998,138.176 ; P6.3@37.664,138.404 ccw(c37.998,138.535) 37.998,138.176 ; v1@98.152,89.4 cw(c97.734,89.4) 98.03,89.105 cw(c98.325,88.809) v1@98.325,89.227 ; v1(98.325,89.4) 97.596,88.671 58.191,88.671 48.666,98.196 48.666,127.508 37.998,138.176
GRESET: P37.6 U38.82 | length 107.5
  Top Layer w0.254: v1@56.621,95.098 cw(c56.204,95.098) 56.499,94.802 cw(c56.794,94.507) v1@56.794,94.925 ; v1(56.794,95.098) 54.987,93.29 54.987,90.961 56.439,89.51 61.468,89.51 70.587,80.391 70.587,62.865 79.302,54.15 90.45,54.15 P37.6@91.376,53.224 ; v1@69.525,115.077 cw(c69.525,114.659) 69.82,114.955 cw(c70.116,115.25) v1@69.698,115.25 ; v1(69.525,115.25) 70.035,114.74 U38.82@74.092,114.74 ; P37.6@90.756,53.288 ccw(c89.697,53.397) 90.45,54.15 ccw(c91.203,54.903) P37.6@91.312,53.844 ; 90.828,53.772 ccw(c91.273,54.218) P37.6@91.338,53.591 ; 90.828,53.772 cw(c90.382,53.327) P37.6@91.009,53.262
  Bottom Layer w0.254: v1(56.794,95.098) 57.988,96.291 64.338,96.291 69.3,101.253 69.3,115.025 v1(69.525,115.25) ; v1@56.794,95.271 ccw(c56.794,95.688) 57.09,95.393 ccw(c57.385,95.098) v1@56.967,95.098 ; 69.3,114.289 cw(c70.486,114.289) v1@69.647,115.128 ; 69.3,114.902 cw(c69.873,114.902) v1@69.468,115.307
I2C1_SCL: R152.2 U38.47 U44.6 | length 37.8
  Top Layer w0.254: U38.47@89.292,116.24 95.488,116.24 99.279,120.031 ; 99.279,120.066 99.279,120.031 ; v1@99.902,134.95 cw(c99.484,134.95) 99.78,134.655 cw(c100.075,134.359) v1@100.075,134.777 ; v1(100.075,134.95) 96.215,131.09 96.215,124.816 99.279,121.752 99.279,120.031
  Top Layer w0.6: U44.6@102.88,136.793 v1(102.88,135.025) ; 103.142,134.393 cw(c103.773,135.025) v1(102.88,135.025) ; R152.2@103.544,133.991 102.88,134.655 v1(102.88,135.025)
  Bottom Layer w0.254: v1(100.075,134.95) 102.805,134.95 v1(102.88,135.025) ; v1@100.197,134.828 cw(c100.493,134.532) 100.493,134.95 cw(c100.493,135.368) v1@100.197,135.072 ; 102.281,134.95 ccw(c102.281,135.624) v1@102.758,135.147
I2C1_SDA: R154.2 U38.48 U44.5 | length 34.8
  Top Layer w0.254: U38.48@89.292,116.74 94.998,116.74 98.679,120.421 98.679,121.387 95.682,124.384 95.682,131.532 100.943,136.793 U44.5@101.61,136.793 ; U44.5@101.484,136.668 ccw(c101.181,136.364) 101.181,136.793 ccw(c101.181,137.223) U44.5@101.484,136.919
  Top Layer w0.6: R154.2@101.61,134.044 U44.5@101.61,136.793
IO_OUT: P41.3 U38.39 | length 77.4
  Top Layer w0.254: U38.39@89.292,112.24 99.845,112.24 102.286,114.681 125.095,114.681 126.492,113.284 126.492,103.149 139.15,90.491 139.15,88.231 141.031,86.35 143.275,86.35 143.7,86.775 ; P41.3@143.338,87.477 cw(c142.838,86.775) 143.7,86.775 ; P41.3@143.7,87.984 143.7,86.775 ; P41.3@144.062,87.477 ccw(c144.562,86.775) 143.7,86.775
LED1: LD34.2 U38.85 | length 53.7
  Top Layer w0.254: LD34.2@43.114,136.652 44.048,136.652 ; LD34.2@43.56,136.379 cw(c44.048,136.08) 44.048,136.652 ; LD34.2@43.56,136.925 ccw(c44.048,137.224) 44.048,136.652 ; U38.85@74.092,113.24 58.685,113.24 53.6,118.325 53.6,123.12 56.794,126.314 56.794,130.912 54.712,132.994 47.706,132.994 44.048,136.652
LED2: LD35.2 U38.86 | length 60.1
  Top Layer w0.254: LD35.2@43.114,133.997 cw(c43.114,130.704) 45.442,133.033 ; LD35.2@43.114,134.251 cw(c43.114,131.571) 45.009,133.466 ; LD35.2@43.114,134.505 cw(c43.114,132.438) 44.575,133.9 ; LD35.2@43.114,134.62 43.855,134.62 ; LD35.2@43.114,134.759 cw(c43.114,133.306) 44.142,134.333 ; LD35.2@43.607,134.445 cw(c43.855,134.357) 43.855,134.62 ; LD35.2@43.607,134.795 ccw(c43.855,134.883) 43.855,134.62 ; U38.86@74.092,112.74 57.935,112.74 52.85,117.825 52.85,123.411 56.083,126.644 56.083,130.378 54.153,132.309 46.166,132.309 43.855,134.62
LED3: LD36.2 U38.87 | length 52.4
  Top Layer w0.254: LD36.2@43.114,132.588 43.152,132.55 44.125,132.55 ; LD36.2@43.522,132.261 cw(c44.125,131.777) 44.125,132.55 ; LD36.2@43.558,132.865 ccw(c44.125,133.218) 44.125,132.55 ; U38.87@74.092,112.24 57.635,112.24 52.25,117.625 52.25,123.751 55.296,126.797 55.296,130.073 53.848,131.521 45.154,131.521 44.125,132.55
LED4: LD37.2 U38.88 | length 51.6
  Top Layer w0.254: LD37.2@43.114,130.556 53.319,130.556 54.2,129.675 54.2,126.565 51.7,124.065 51.7,117.19 57.15,111.74 U38.88@74.092,111.74 ; LD37.2@43.484,130.186 cw(c44.377,129.293) 44.377,130.556 cw(c44.377,131.819) LD37.2@43.484,130.926
LINKA: P36.1 U38.63 | length 118.6
  Top Layer w0.254: P36.1@50.736,68.464 50.797,68.525 62.226,68.525 65.888,72.187 65.888,78.638 59.639,84.887 52.07,84.887 49.225,87.732 49.225,97.892 53.162,101.829 v1(54.788,101.829) ; P36.1@50.997,68.203 cw(c51.774,67.426) 51.774,68.525 ; P36.1@51.177,68.023 cw(c52.387,66.813) 52.387,68.525 ; P36.1@51.177,68.905 ccw(c52.093,69.821) 52.093,68.525 ; v1@54.665,101.706 ccw(c54.37,101.411) 54.37,101.829 ccw(c54.37,102.246) v1@54.665,101.951 ; v1@81.178,125.1 cw(c81.178,124.682) 81.474,124.977 cw(c81.769,125.273) v1@81.351,125.273 ; v1(81.178,125.273) 81.692,124.759 U38.63@81.692,119.34
  Bottom Layer w0.254: v1@54.788,101.656 cw(c54.788,101.238) 55.083,101.533 cw(c55.378,101.829) v1@54.961,101.829 ; v1(54.788,101.829) 55.372,101.244 57.074,101.244 58.046,100.272 61.621,100.272 65.05,103.702 65.05,117.806 71.628,124.384 78.715,124.384 79.316,124.985 79.422,124.985 79.686,125.249 81.155,125.249 v1(81.178,125.273) ; 80.704,125.249 ccw(c80.704,125.747) v1@81.056,125.395 ; 80.817,125.249 cw(c80.817,124.912) v1@81.056,125.15
LINKB: P36.2 U38.64 | length 117.5
  Top Layer w0.254: P36.2@50.736,65.924 60.361,65.924 66.497,72.06 66.497,78.867 59.944,85.42 52.476,85.42 49.809,88.087 49.809,97.384 53.365,100.94 v1(54.483,100.94) ; P36.2@50.997,65.663 cw(c51.627,65.033) 51.627,65.924 cw(c51.627,66.815) P36.2@50.997,66.185 ; P36.2@51.177,65.483 cw(c52.24,64.42) 52.24,65.924 cw(c52.24,67.428) P36.2@51.177,66.365 ; v1@54.361,100.817 ccw(c54.065,100.522) 54.065,100.94 ccw(c54.065,101.357) v1@54.361,101.062 ; v1@80.67,124.439 cw(c80.67,124.022) 80.966,124.317 cw(c81.261,124.612) v1@80.843,124.612 ; v1(80.67,124.612) 81.192,124.091 U38.64@81.192,119.34
  Bottom Layer w0.254: v1@54.458,100.787 54.686,100.559 56.159,100.559 56.922,99.796 62.102,99.796 65.575,103.269 65.575,117.467 71.958,123.85 78.943,123.85 79.705,124.612 v1(80.67,124.612) ; v1@80.548,124.49 ccw(c80.253,124.195) 80.253,124.612 ccw(c80.253,125.03) v1@80.548,124.735
NetBT1_1: BT1.1 U93.8 | length 15.3
  Top Layer w0.6: U93.8@83.82,140.716 87.284,140.716 v3(87.65,140.35) ; 85.958,140.716 cw(c85.958,138.658) v3@87.413,140.113
  Bottom Layer w0.6: v3@87.413,140.113 cw(c86.841,139.541) 87.65,139.541 cw(c88.459,139.541) v3@87.887,140.113 ; v3(87.65,140.35) 87.65,138.775 88.9,137.525 BT1.1@88.9,135.128 ; BT1.1@88.405,135.623 ccw(c87.21,136.818) 88.9,136.818 ccw(c90.59,136.818) BT1.1@89.395,135.623
NetBZ2_2: BZ2.2 R167.1 | length 13.6
  Bottom Layer w0.8: R167.1@60.328,138.627 62.363,138.627 67.5,133.49 BZ2.2@67.5,130.556 ; BZ2.2@67.253,130.803 ccw(c66.655,131.401) 67.5,131.401 ccw(c68.345,131.401) BZ2.2@67.747,130.803
NetC28_1: C28.1 U45.5 | length 4.1
  Top Layer w0.6: U45.5@57.314,79.375 60.144,79.375 C28.1@60.395,79.124 ; 59.439,79.375 cw(c59.439,78.262) C28.1@60.226,79.049
NetC28_2: C28.2 U45.4 | length 5.1
  Top Layer w0.6: U45.4@57.314,78.105 59.07,78.105 59.6,77.575 60.217,77.575 C28.2@60.395,77.397 ; 59.332,77.843 ccw(c60.169,78.68) C28.2@60.29,77.503 ; 59.615,77.575 cw(c59.615,76.71) C28.2@60.226,77.322
NetC30_1: C30.1 U45.3 | length 9
  Top Layer w0.6: 55.724,76.499 cw(c56.414,75.81) U45.3@56.414,76.785 ; 55.883,76.658 cw(c56.249,76.292) U45.3@56.399,76.787 ; C30.1@56.17,71.912 ccw(c56.512,72.254) C30.1@56.512,71.771 ; C30.1@56.512,71.571 55.325,72.758 55.325,76.1 56.06,76.835 U45.3@57.314,76.835
NetC30_2: C30.2 U45.1 | length 3.1
  Top Layer w0.6: U45.1@57.314,74.295 58.225,73.384 58.225,71.585 C30.2@58.239,71.571
NetC34_2: C34.2 U45.6 | length 6.4
  Top Layer w0.6: U45.6@57.314,80.645 61.83,80.645 62.541,79.934 C34.2@62.541,79.067
NetC35_1: C35.1 U45.2 | length 3.1
  Top Layer w0.6: U45.2@57.314,75.565 60.392,75.565 C35.1@60.395,75.568
NetC47_2: C47.2 R173.1 U50.5 | length 15.7
  Top Layer w0.6: C47.2@108.515,66.137 108.515,66.665 111.25,69.4 111.175,69.475 111.175,73.475 110.696,73.954 U50.5@109.35,73.954 ; C47.2@108.621,66.231 cw(c109.927,66.231) 109.004,67.154
  Top Layer w0.8: R173.1@108.515,61.992 C47.2@108.515,66.137
NetC69_2: C69.2 R349.2 Y2.1 | length 5.4
  Bottom Layer w0.8: R349.2@70.431,95.561 Y2.1@72.587,95.561 ; 71.661,95.561 cw(c71.661,94.521) Y2.1@72.397,95.257 ; Y2.1@72.701,95.447 C69.2@74.349,95.447 ; Y2.1@72.891,95.751 ccw(c73.627,96.487) 73.627,95.447
NetC70_2: C70.2 R350.2 Y2.2 | length 6
  Bottom Layer w0.8: R350.2@70.431,93.529 Y2.2@72.612,93.529 ; 71.723,93.529 cw(c71.723,92.576) Y2.2@72.397,93.25 ; 71.875,93.529 ccw(c71.875,94.266) Y2.2@72.397,93.745 ; Y2.2@72.726,93.415 C70.2@74.349,93.415 ; Y2.2@72.891,93.745 ccw(c73.688,94.541) 73.688,93.415
NetCN1_11: CN1.11 R146.2 | length 4.4
  Bottom Layer w0.8: CN1.11@41.306,114.3 R146.2@43.812,114.3 ; CN1.11@41.652,113.954 cw(c42.487,113.119) 42.487,114.3 cw(c42.487,115.481) CN1.11@41.652,114.646
NetCN1_19: CN1.19 R370.2 | length 4.4
  Bottom Layer w0.6: CN1.19@40.967,124.799 CN1.19@41.306,124.46
  Bottom Layer w1: CN1.19@40.967,124.799 R370.2@40.967,127.057 ; 40.967,126.218 ccw(c43.063,126.218) CN1.19@41.581,124.735
NetDZ1_1: DZ1.1 R191.1 U49.5 | length 11.7
  Top Layer w0.6: U49.5@125.984,72.898 127.602,72.898 130.65,69.85 DZ1.1@134.112,69.85 R191.1@134.112,67.497
NetJ2_1: J2.1 R151.1 R156.1 | length 5.2
  Bottom Layer w0.8: R156.1@153.8,102.051 R151.1@153.8,100.019 153.857,100.076 J2.1@156.972,100.076
NetJ2_10: J2.10 R150.1 R155.2 | length 4.9
  Bottom Layer w0.8: R155.2@154.251,119.945 154.251,117.856 R150.1@154.308,117.799 154.493,117.984 J2.10@156.981,117.984
NetKEY2_2: KEY2.2 KEY2.3 R139.2 | length 18.7
  Top Layer w0.8: KEY2.2@41.359,46.394 ccw(c40.334,47.419) 41.783,47.419 ccw(c43.232,47.419) KEY2.2@42.207,46.394 ; KEY2.3@41.359,52.158 cw(c40.334,51.133) 41.783,51.133 cw(c43.232,51.133) KEY2.3@42.207,52.158 ; KEY2.3@41.783,52.832 KEY2.2@41.783,45.72 44.07,45.72 44.647,46.297 R139.2@44.647,47.933 ; KEY2.2@42.207,45.296 cw(c43.232,44.271) 43.232,45.72 cw(c43.232,47.169) KEY2.2@42.207,46.144
NetLD34_1: LD34.1 R161.2 | length 29.3
  Top Layer w0.3: 40.19,135.628 cw(c41.214,134.603) LD34.1@41.214,136.052 ; 40.431,135.869 ccw(c39.748,136.552) LD34.1@40.714,136.552 ; LD34.1@40.702,136.14 cw(c41.214,135.628) LD34.1@41.214,136.352 ; LD34.1@41.214,136.652 38.75,134.188 38.75,128.865 42.59,125.025 51.55,125.025 52.775,126.25 R161.2@52.775,127.181 ; R161.2@52.594,127 cw(c52.156,126.562) 52.775,126.562 cw(c53.394,126.562) R161.2@52.956,127
NetLD35_1: LD35.1 R162.2 | length 22.5
  Top Layer w0.3: LD35.1@40.775,134.38 ccw(c40.37,134.158) 40.37,134.62 ; LD35.1@40.775,134.86 cw(c40.37,135.082) 40.37,134.62 ; LD35.1@41.214,134.62 40.37,134.62 ; R162.2@50.562,127 cw(c50.124,126.562) 50.743,126.562 cw(c51.362,126.562) R162.2@50.924,127 ; R162.2@50.743,127.181 50.743,126.293 50.125,125.675 43.025,125.675 39.425,129.275 39.425,133.675 40.37,134.62
NetLD36_1: LD36.1 R163.2 | length 19.7
  Top Layer w0.3: 40.088,132.213 cw(c40.485,131.815) LD36.1@40.871,132.224 ; 40.258,132.383 cw(c40.903,131.739) LD36.1@41.252,132.58 ; 40.306,132.431 cw(c40.697,132.04) LD36.1@41.077,132.442 ; 40.525,132.65 cw(c40.909,132.265) LD36.1@41.283,132.661 ; LD36.1@40.753,132.395 ccw(c40.463,132.274) 40.463,132.588 ; LD36.1@40.753,132.781 cw(c40.463,132.902) 40.463,132.588 ; LD36.1@41.214,132.588 40.463,132.588 ; 48.114,126.584 ccw(c47.516,127.181) R163.2@48.361,127.181 ; R163.2@48.339,126.809 cw(c48.617,126.532) R163.2@48.617,126.925 ; R163.2@48.711,127.181 47.78,126.25 43.4,126.25 40.05,129.6 40.05,132.175 40.463,132.588
NetLD37_1: LD37.1 R164.2 | length 12.9
  Top Layer w0.3: LD37.1@41.114,130.456 ccw(c42.369,130.456) 41.482,129.568 ; LD37.1@41.214,130.556 41.214,129.836 43.869,127.181 R164.2@46.679,127.181 ; LD37.1@41.414,130.456 ccw(c43.394,130.456) 41.994,129.056 ; LD37.1@41.714,130.456 ccw(c44.418,130.456) 42.506,128.544 ; R164.2@46.404,127 ccw(c45.966,126.562) 45.966,127.181 ccw(c45.966,127.8) R164.2@46.404,127.362
NetLD83_1: LD83.1 R369.2 | length 2.9
  Top Layer w1: LD83.1@144.272,57.846 144.395,57.969 R369.2@146.485,57.969 ; LD83.1@144.478,57.74 cw(c145.031,57.187) 145.031,57.969
NetP8_2: P8.2 R174.2 R362.2 | length 69.6
  Top Layer w0.8: R174.2@129.197,61.195 cw(c128.474,60.472) 129.497,60.472 ; R174.2@129.497,61.349 R362.2@129.497,58.751 130.349,58.751 131.325,57.775 131.325,52.65 133.05,50.925 160.8,50.925 166.517,56.642 ; R362.2@129.591,58.745 cw(c129.591,56.898) 130.896,58.204 ; R362.2@129.592,58.745 cw(c129.791,57.435) 130.728,58.372 ; 163.445,53.57 cw(c168.148,48.867) P8.2@168.148,55.518 ; 164.811,54.936 cw(c168.148,51.598) P8.2@168.148,56.318 ; 165.702,55.827 cw(c166.538,54.99) P8.2@167.363,55.837 ; 166.176,56.301 cw(c168.148,54.33) P8.2@168.148,57.118 ; 166.274,56.399 cw(c167.103,55.57) P8.2@167.922,56.41 ; P8.2@167.098,56.242 ccw(c166.517,56.021) 166.517,56.642 ; P8.2@167.098,57.042 cw(c166.517,57.263) 166.517,56.642 ; P8.2@168.148,56.642 166.517,56.642
NetP8_3: P8.3 Q10.3 Q11.3 R175.2 | length 85
  Top Layer w0.8: R175.2@129.374,64.678 cw(c129.374,63.833) R175.2@129.971,64.431 ; R175.2@129.374,65.028 131.2,63.202 131.2,59.875 132.6,58.475 132.6,53.45 133.9,52.15 160.3,52.15 168.148,59.998 P8.3@168.148,60.452 ; Q10.3@134.271,81.28 134.271,79.554 135.287,78.538 Q11.3@135.287,77.216 136.825,75.678 v2(136.825,64.45) ; 165.908,57.758 ccw(c163.214,60.452) P8.3@167.024,60.452 ; 167.004,58.854 cw(c168.148,57.71) P8.3@168.148,59.328 ; 167.274,59.124 ccw(c165.946,60.452) P8.3@167.824,60.452
  Bottom Layer w0.8: v2(131.15,63.05) 132.25,61.95 135.825,61.95 136.825,62.95 v2(136.825,64.45)
NetQ9_B: Q9.B R165.1 | length 1.9
  Bottom Layer w0.8: R165.1@56.061,142.748 Q9.B@57.912,142.748
NetQ9_C: Q9.C R167.2 | length 3.1
  Bottom Layer w0.8: R167.2@58.601,138.627 58.601,140.44 Q9.C@58.877,140.716 ; 58.601,139.733 cw(c59.682,139.733) Q9.C@58.918,140.498
NetQ10_1: Q10.1 Q11.2 | length 8.6
  Top Layer w0.6: Q10.1@131.921,82.23 132.745,82.23 133.2,81.775 133.2,79.65 132.8,79.25 132.075,79.25 131.625,78.8 131.625,77.578 Q11.2@132.937,76.266
NetQ10_2: Q10.2 R171.1 U49.6 | length 22.8
  Top Layer w0.6: 124.64,74.435 ccw(c125.273,75.068) U49.6@125.273,74.173 ; U49.6@125.984,74.168 124.907,74.168 123.775,75.3 123.775,78.35 127.721,82.296 R171.1@129.54,82.296 129.54,81.21 ; R171.1@129.195,81.951 ccw(c128.363,81.119) 128.363,82.296 ccw(c128.363,83.473) R171.1@129.195,82.641 ; Q10.2@131.921,80.33 130.42,80.33 129.54,81.21 ; 129.54,81.21 cw(c130.506,81.21) 129.864,81.932 ccw(c130.506,81.21) 129.54,81.21 ; 129.54,81.21 ccw(c128.574,81.21) 129.216,81.932 cw(c128.574,81.21) 129.54,81.21
NetQ11_1: Q11.1 R176.2 | length 8.1
  Top Layer w0.6: R176.2@130.375,75.943 cw(c130.375,75.46) R176.2@130.716,75.802 ; R176.2@130.375,76.143 131.668,74.85 133.475,74.85 134.1,75.475 134.1,77.003 Q11.1@132.937,78.166
NetR137_1: R137.1 U38.37 | length 15.4
  Top Layer w0.254: U38.37@89.292,111.24 100.64,111.24 102.277,111.24 R137.1@103.248,112.211 ; 102.611,111.574 cw(c103.248,110.938) R137.1@103.248,111.838 ; 102.837,111.8 ccw(c102.52,112.117) R137.1@102.968,112.117
NetR157_1: R157.1 U42.8 | length 12.5
  Bottom Layer w0.6: R157.1@141.125,126.639 cw(c141.125,126.156) R157.1@141.466,126.498 ; R157.1@141.125,126.839 142.564,125.4 148.25,125.4 150.267,127.417 U42.8@151.783,127.417
NetR158_1: R158.1 U43.8 | length 11.4
  Bottom Layer w0.6: R158.1@142.116,138.119 142.116,137.734 142.8,137.05 150.469,137.05 U43.8@151.588,138.169 ; R158.1@142.223,138.025 ccw(c143.183,138.025) 142.504,137.346
NetR174_1: R174.1 R179.1 U49.2 | length 25.3
  Top Layer w0.6: U49.2@120.396,75.438 122.062,75.438 123.825,73.675 123.825,65.121 R174.1@127.474,61.472 ; 126.706,62.24 ccw(c127.474,63.008) R174.1@127.474,61.922 ; R174.1@126.947,61.999 cw(c126.52,61.572) R174.1@127.124,61.572
  Top Layer w0.8: R179.1@125.884,58.866 127.474,60.456 R174.1@127.474,61.472 ; R179.1@126.234,58.866 cw(c127.079,58.866) R179.1@126.481,59.463 ; R179.1@126.4,59.382 ccw(c124.409,61.372) R174.1@127.224,61.372
NetR175_1: R175.1 R177.2 U49.3 | length 18
  Top Layer w0.6: U49.3@120.396,74.168 121.632,74.168 122.625,73.175 v2(122.625,72.075) v2@122.575,72.025 ; U49.3@121.107,74.163 cw(c121.107,72.885) 122.011,73.789 ; U49.3@121.108,74.163 cw(c121.247,73.258) 121.894,73.906
  Top Layer w0.8: R175.1@127.408,65.094 v2(127.408,67.35) R177.2@127.408,68.65 ; 127.408,65.891 ccw(c128.237,65.891) R175.1@127.651,65.305
  Bottom Layer w0.6: v2(122.625,72.075) 123.8,72.075 127.55,68.325 127.55,67.492 v2(127.408,67.35) ; v2@127.337,67.421 ccw(c126.824,67.934) 127.55,67.934
NetR176_1: R176.1 U49.7 | length 3.3
  Top Layer w0.6: U49.7@125.984,75.438 127.943,75.438 R176.1@128.648,76.143 ; R176.1@128.306,75.802 cw(c128.648,75.46) R176.1@128.648,75.943
NetR179_2: R179.2 R183.2 R184.1 | length 6.1
  Top Layer w0.8: R184.1@119.788,56.966 R179.2@125.884,56.966
NetR183_1: R183.1 R185.1 U49.1 | length 22.4
  Top Layer w0.6: U49.1@120.396,76.708 119.608,76.708 118.65,75.75 118.65,64.25 120.725,62.175 122.199,62.175 R185.1@122.328,62.046 ; 121.072,62.175 cw(c121.072,60.89) R185.1@121.981,61.799
  Top Layer w0.8: R183.1@122.328,58.866 R185.1@122.328,62.046
NetR190_1: R190.1 U50.6 U50.7 | length 3.4
  Top Layer w0.6: R190.1@107.194,72.741 107.251,72.684 U50.6@109.35,72.684 U50.7@109.35,71.414
NetR354_1: R354.1 U42.7 | length 4.6
  Bottom Layer w0.6: U42.7@151.783,128.687 154.402,128.687 R354.1@154.783,128.306 ; 153.26,128.687 cw(c153.26,126.883) R354.1@154.536,128.159
NetR355_1: R355.1 U42.6 | length 4.6
  Bottom Layer w0.6: U42.6@151.783,129.957 154.402,129.957 R355.1@154.783,130.338 ; 153.26,129.957 ccw(c153.26,131.761) R355.1@154.536,130.485
NetR356_1: R356.1 U43.7 | length 4.6
  Bottom Layer w0.6: U43.7@151.588,139.439 154.207,139.439 R356.1@154.588,139.058 ; 153.065,139.439 cw(c153.065,137.635) R356.1@154.341,138.911
NetR357_1: R357.1 U43.6 | length 4.6
  Bottom Layer w0.6: U43.6@151.588,140.709 154.207,140.709 R357.1@154.588,141.09 ; 153.065,140.709 ccw(c153.065,142.513) R357.1@154.341,141.237
NetU93_2: U93.2 Y3.2 | length 5.1
  Top Layer w0.6: Y3.2@74.664,140.358 cw(c74.77,138.99) 75.74,139.96 ; Y3.2@74.676,140.208 75.492,140.208 76.254,139.446 U93.2@78.232,139.446
NetU93_3: U93.3 Y3.1 | length 5.2
  Top Layer w0.6: Y3.1@74.701,138.176 U93.3@78.232,138.176 ; Y3.1@74.994,137.883 cw(c75.701,137.176) 75.701,138.176 ; Y3.1@74.994,138.52 ccw(c75.824,139.349) 75.824,138.176
NLINK: P38.2 U38.57 | length 148
  Top Layer w0.254: v1@57.231,103.662 cw(c56.445,102.876) 57.556,102.876 ; v1(57.353,103.784) 57.556,103.581 57.556,100.127 59.284,98.4 59.284,94.234 72.39,81.128 72.39,64.033 78.665,57.759 88.459,57.759 90.3,59.6 92.8,59.6 93.65,58.75 93.65,48.45 94.972,47.128 P38.2@98.084,47.128 ; v1@57.41,103.842 cw(c57.058,103.489) 57.556,103.489 ; v1@84.125,129.189 cw(c84.125,128.772) 84.42,129.067 cw(c84.715,129.362) v1@84.298,129.362 ; v1(84.125,129.362) 84.692,128.795 U38.57@84.692,119.34 ; P38.2@97.643,46.687 ccw(c96.58,45.624) 96.58,47.128 ccw(c96.58,48.632) P38.2@97.643,47.569 ; P38.2@97.823,46.867 ccw(c97.193,46.237) 97.193,47.128 ccw(c97.193,48.019) P38.2@97.823,47.389
  Bottom Layer w0.254: v1@57.476,103.907 ccw(c58.139,104.57) 58.139,103.632 ; v1@57.556,103.632 58.674,103.632 61.875,106.833 61.875,119.152 70.152,127.429 77.264,127.429 79.225,129.39 v1@84.097,129.39 ; 83.641,129.39 cw(c83.641,128.878) v1@84.002,129.24 ; 83.773,129.39 ccw(c83.773,129.714) v1@84.002,129.485
NREADY: P38.1 U38.58 | length 145.4
  Top Layer w0.254: v1(56.642,102.768) 56.972,102.438 56.972,99.949 58.75,98.171 58.75,93.929 71.704,80.975 71.704,63.729 78.383,57.05 92.375,57.05 93.125,56.3 93.125,47.35 95.887,44.588 P38.1@98.084,44.588 ; v1@83.566,128.58 cw(c83.566,128.162) 83.861,128.457 cw(c84.157,128.753) v1@83.739,128.753 ; v1(83.566,128.753) 84.192,128.127 U38.58@84.192,119.34 ; P38.1@97.643,44.147 ccw(c96.58,43.084) 96.58,44.588 ccw(c96.58,46.092) P38.1@97.643,45.029 ; P38.1@97.823,44.327 ccw(c97.193,43.697) 97.193,44.588 ccw(c97.193,45.479) P38.1@97.823,44.849
  Bottom Layer w0.254: v1(56.642,102.768) 58.623,102.768 59.678,103.823 59.948,103.823 62.425,106.3 62.425,119.016 70.373,126.965 77.562,126.965 79.35,128.753 v1(83.566,128.753) ; v1@56.764,102.646 cw(c57.06,102.351) 57.06,102.768 cw(c57.06,103.186) v1@56.764,102.891 ; v1@83.444,128.63 ccw(c83.148,128.335) 83.148,128.753 ccw(c83.148,129.17) v1@83.444,128.875